# Altium PCB PCB_Internship.PcbDoc
Units mm, origin at the board's own origin, x right, y up, seen from the top; angles counter-clockwise.
Board outline 65 x 145 mm, 4 copper layers (Top Layer, Layer 1, Layer 2, Bottom Layer), stack 1.575 mm thick; 124 components, 62 nets, 264 pads, 86 vias.
Unrouted connection lines stored in the file: 21.
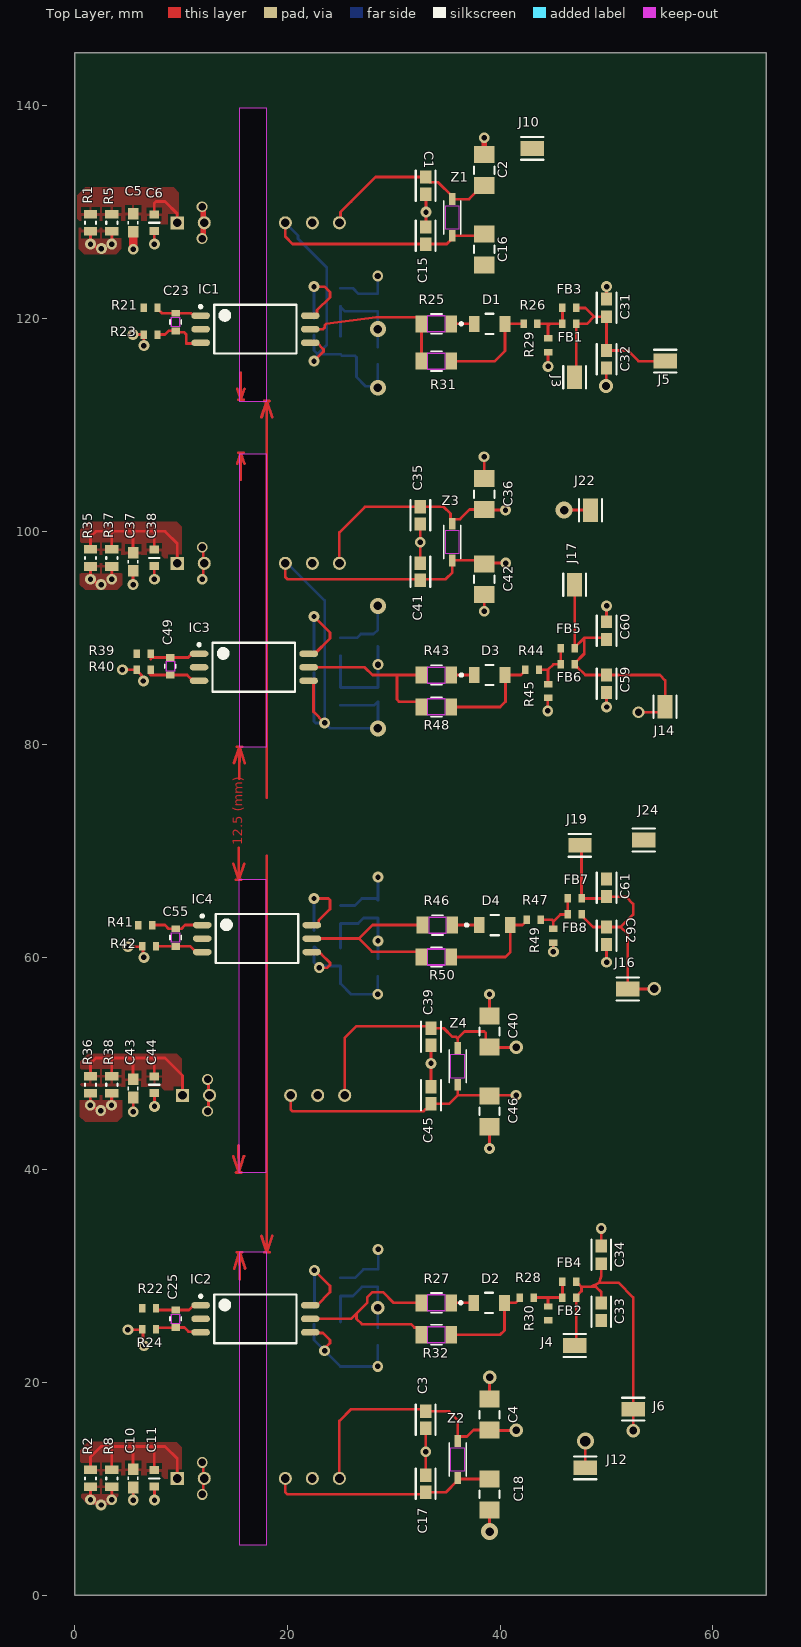
[diagram p0: Top Layer view]
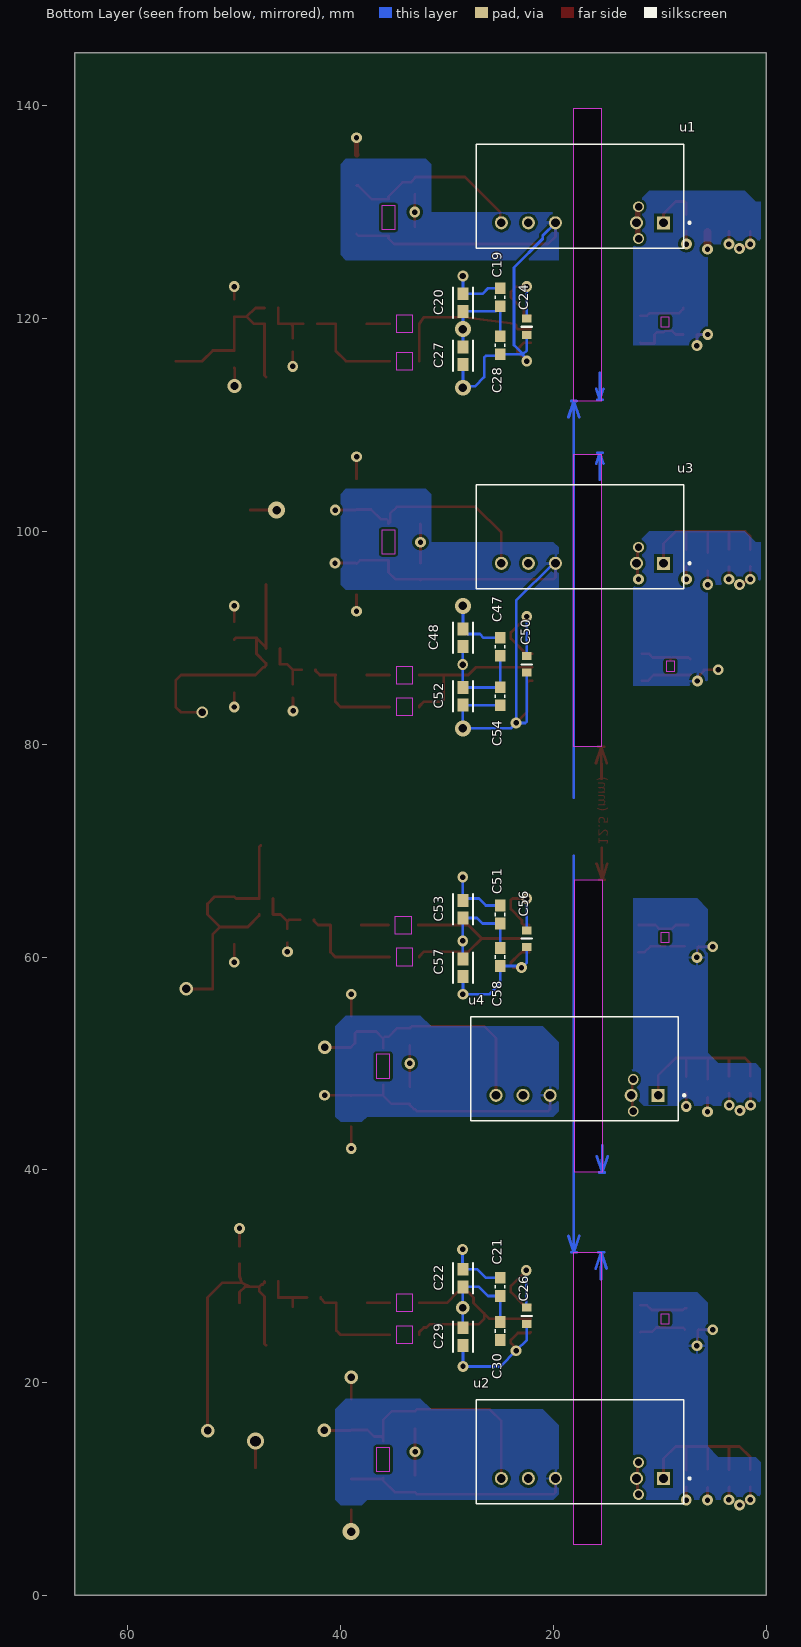
[diagram p1: Bottom Layer view, seen from below]
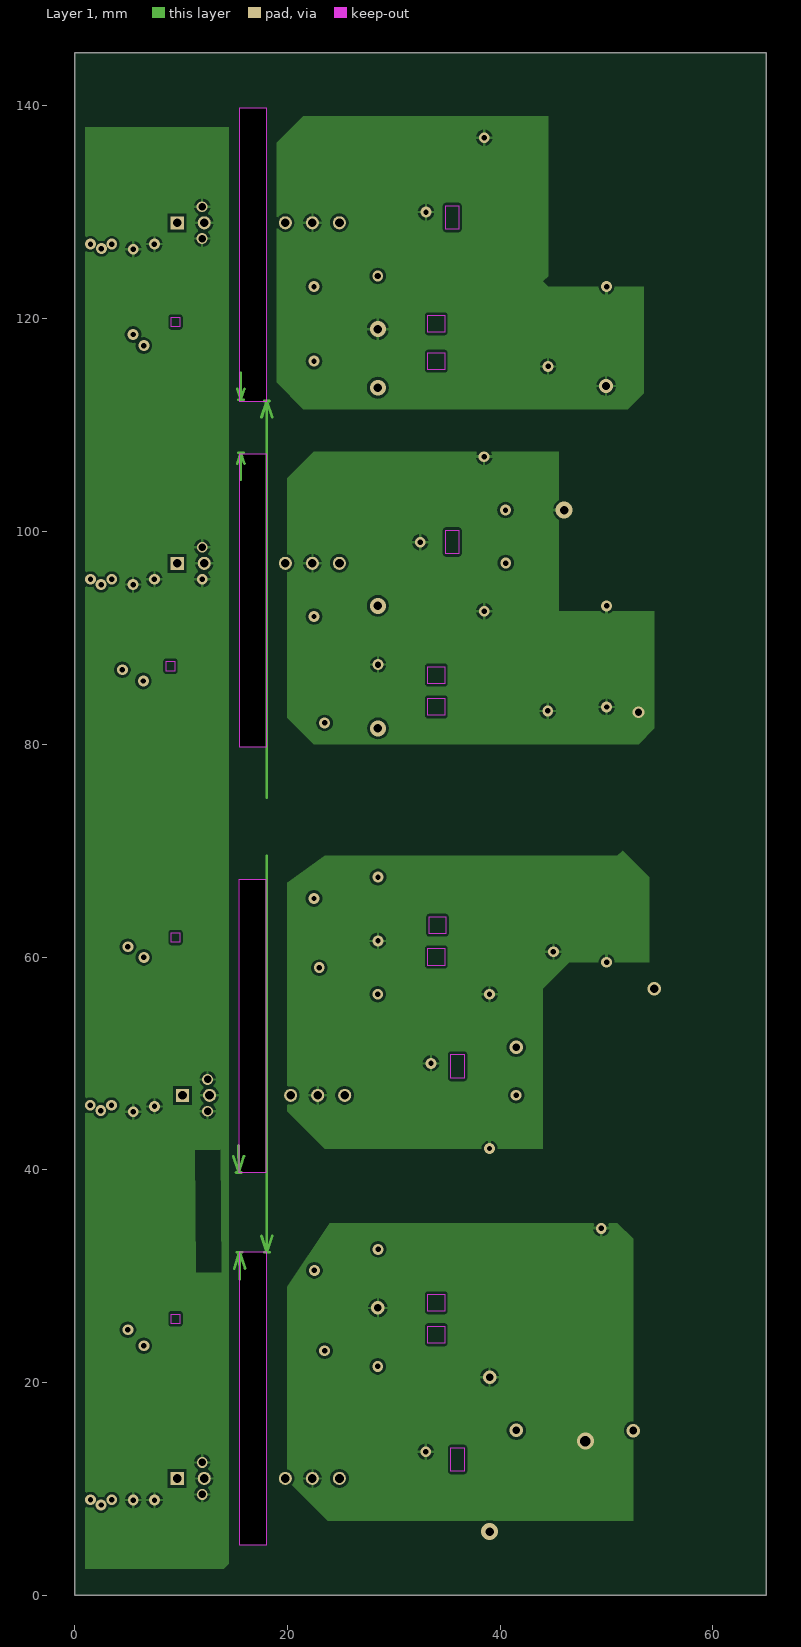
[diagram p2: Layer 1]
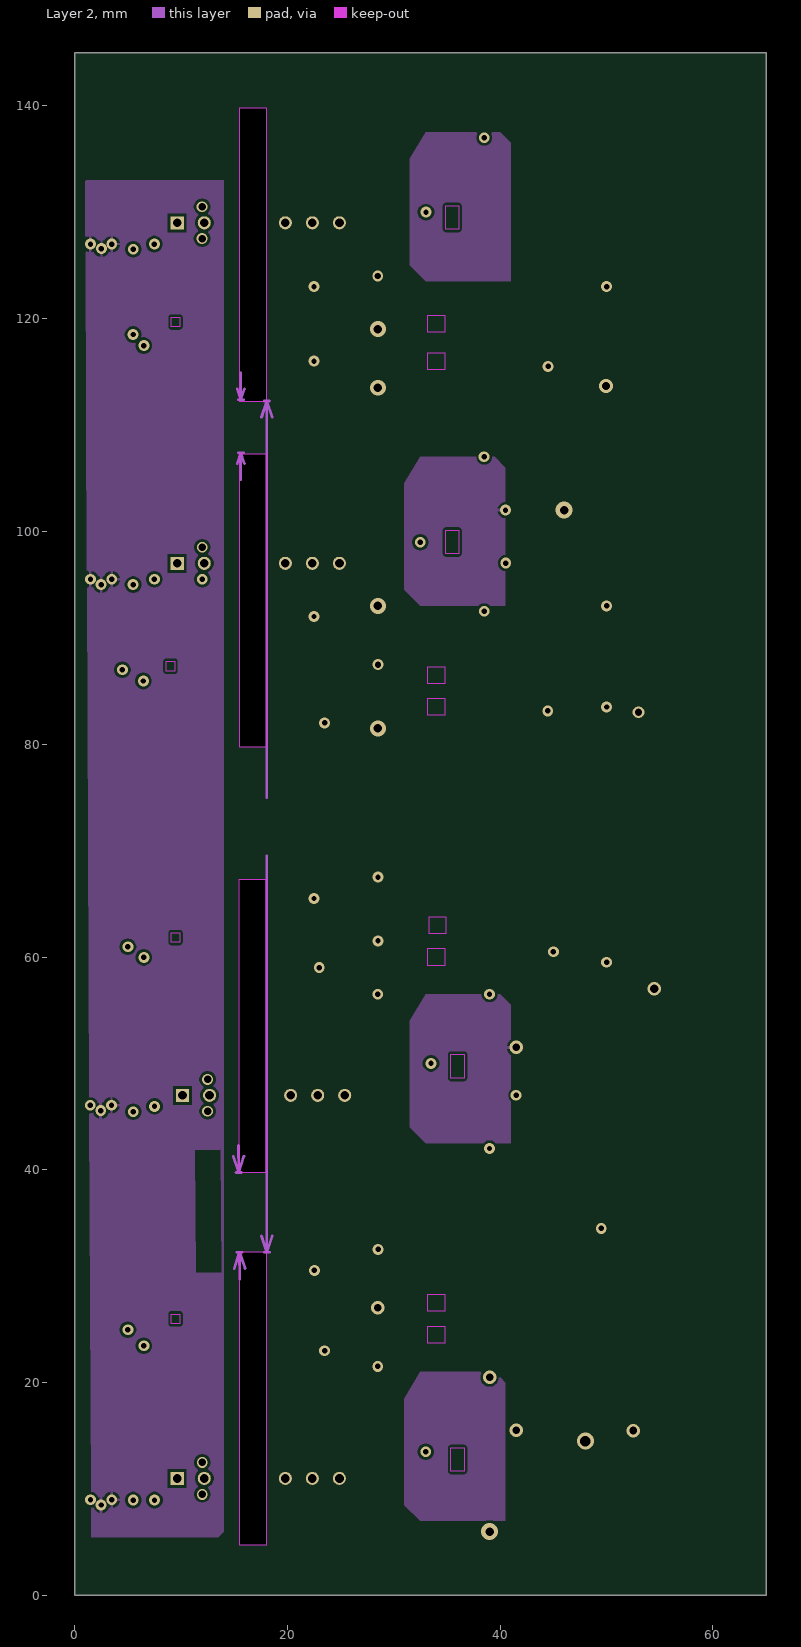
[diagram p3: Layer 2]
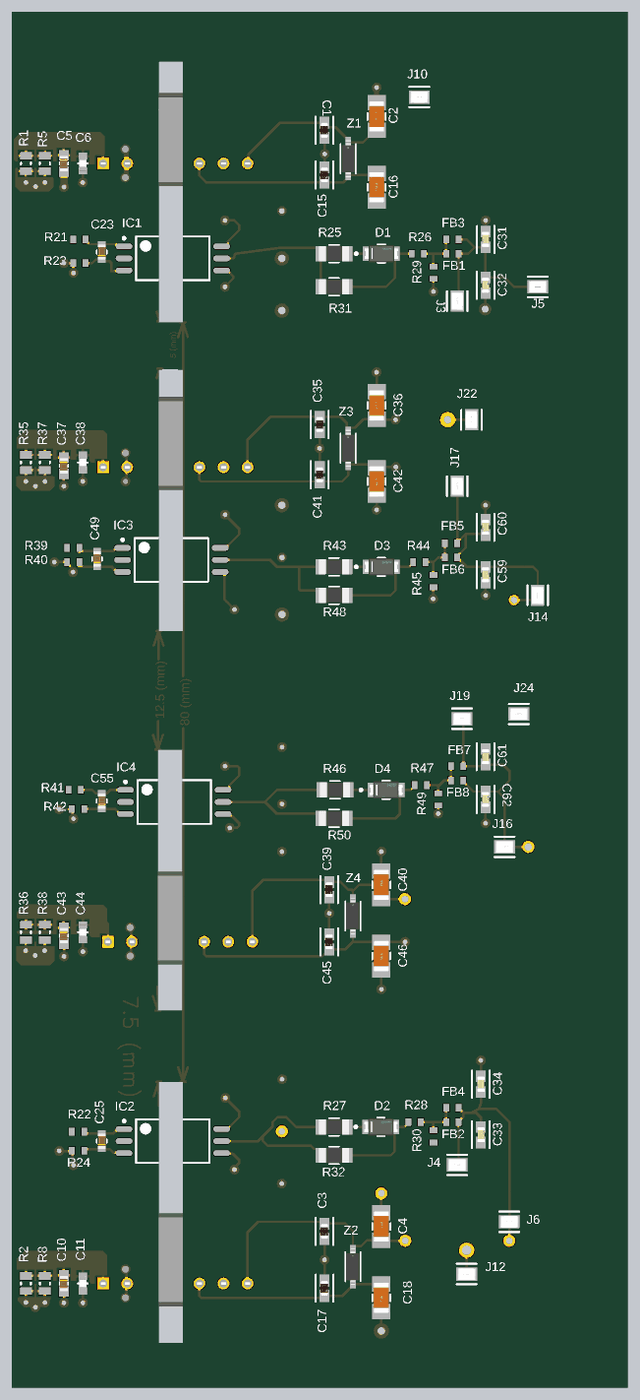
[diagram p4: 3D render of the assembled board from above, using the file's embedded part models]
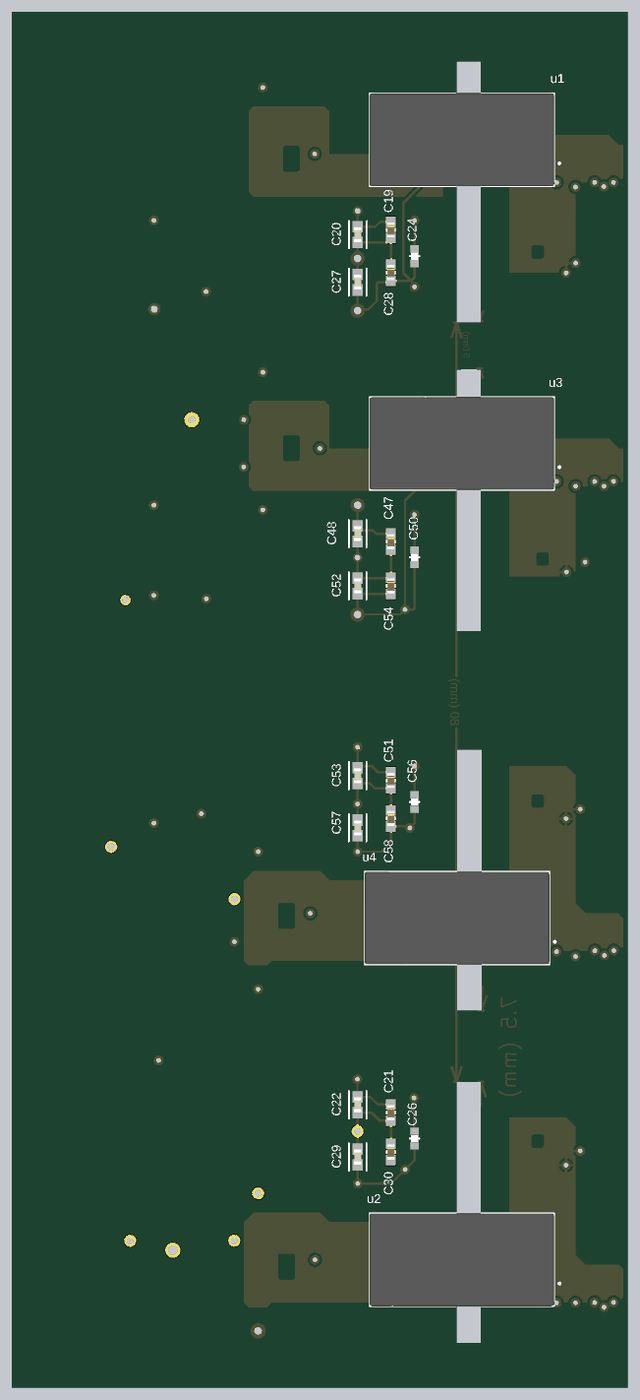
[diagram p5: 3D render of the assembled board from below, using the file's embedded part models]

## Layer stack, top to bottom
Top Solder: solder mask 0.0127, Solder Resist, Dk 3.5
Top Layer: signal copper 0.0356
Dielectric 2: prepreg 0.127, PP-006, Dk 4.1
Layer 1: signal copper 0.0356
Dielectric4: dielectric 1.1786, FR-4, Dk 4.8
Layer 2: signal copper 0.0356
Dielectric 3: prepreg 0.127, PP-006, Dk 4.1
Bottom Layer: signal copper 0.0356
Bottom Solder: solder mask 0.0127, Solder Resist, Dk 3.5

## Board outline
0,145 0,0 65,0 65,145
cut-out: 15.425,67.25 15.425,39.75 18,39.75 18,67.25
cut-out: 15.5,107.25 15.5,79.75 18.075,79.75 18.075,107.25
cut-out: 15.5,32.25 15.5,4.75 18.075,4.75 18.075,32.25
cut-out: 15.5,139.75 15.5,112.25 18.075,112.25 18.075,139.75

## Design rules (kind name [scope] priority, off if disabled: settings)
Clearance [All] p1: gap=0.254 ignorepadtopadclearanceinfootprint=FALSE except(0: Arc-Hole Track-Hole SMDPad-Hole THPad-Hole Via-Hole Fill-Hole Poly-Hole Region-Hole Text-Hole)
PolygonConnect [All] p1: connectstyle=Relief reliefconductorwidth=0.254 reliefentries=4 polygonreliefangle="90 Angle" airgapwidth=0.254
RoutingVias [All] p1: holewidth=0.711 width=1.27 viastyle="Through Hole" minholewidth=0.711 minwidth=1.27 maxholewidth=0.711 maxwidth=1.27
SolderMaskExpansion [All] p1: expansion=0.102 istentingtop=FALSE
Width [All] p1: maxlimit=0.254 minlimit=0.254 preferedwidth=0.254
30 further rules are at their usual default settings.

## Components (designator, comment, footprint, x,y, rotation, side; value= is the part's Value field where it differs from the comment)
C1 "1uF" FP-0603-L_1_6_0_15-W_0_8-IPC_A 33,132.5 r270 top
C2 "10uF" FP-1206-L_3_2_0_2-W_1_6_0-IPC_A 38.5,133.951 r90 top
C3 "1uF" FP-0603-L_1_6_0_15-W_0_8-IPC_A 33,16.5 r270 top
C4 "10uF" FP-1206-L_3_2_0_2-W_1_6_0-IPC_A 39,17 r90 top
C5 "0.1uF" CAPC1608X90 5.5,129 r270 top
C6 "ZRB18AR6YA475KE05L" "FP-ZRB18A-0_2-MFG - duplicate" 7.5,129 r270 top
C10 "0.1uF" CAPC1608X90 5.5,11 r270 top
C11 "ZRB18AR6YA475KE05L" "FP-ZRB18A-0_2-MFG - duplicate" 7.5,11 r270 top
C15 "1uF" FP-0603-L_1_6_0_15-W_0_8-IPC_A 33,127.802 r270 top
C16 "10uF" FP-1206-L_3_2_0_2-W_1_6_0-IPC_A 38.5,126.5 r90 top
C17 "1uF" FP-0603-L_1_6_0_15-W_0_8-IPC_A 33,10.5 r270 top
C18 "10uF" FP-1206-L_3_2_0_2-W_1_6_0-IPC_A 39,9.5 r90 top
C19 "100nF" CAPC1608X90 25,122 r270 bottom
C20 "100nF" FP-C0603C-CF-IPC_A 28.5,121.5 r270 bottom value="10,000 pF"
C21 "100nF" CAPC1608X90 25,29 r270 bottom
C22 "100nF" FP-C0603C-CF-IPC_A 28.5,29.826 r270 bottom value="10,000 pF"
C23 "DNP" CAP_CL10_SAM 9.5,119.672 r90 top
C24 "ZRB18AR6YA475KE05L" "FP-ZRB18A-0_2-MFG - duplicate" 22.5,119.225 r270 bottom
C25 "DNP" CAP_CL10_SAM 9.5,26 r90 top
C26 "ZRB18AR6YA475KE05L" "FP-ZRB18A-0_2-MFG - duplicate" 22.5,26.275 r270 bottom
C27 "100nF" FP-C0603C-CF-IPC_A 28.5,116.5 r270 bottom value="10,000 pF"
C28 "100nF" CAPC1608X90 25,117.5 r270 bottom
C29 "100nF" FP-C0603C-CF-IPC_A 28.5,24.326 r270 bottom value="10,000 pF"
C30 "100nF" CAPC1608X90 25,24.85 r270 bottom
C31 "100nF" FP-C0603C-CF-IPC_A 50,121 r90 top value="10,000 pF"
C32 "100nF" FP-C0603C-CF-IPC_A 50,116.174 r270 top value="10,000 pF"
C33 "100nF" FP-C0603C-CF-IPC_A 49.5,26.674 r270 top value="10,000 pF"
C34 "100nF" FP-C0603C-CF-IPC_A 49.5,32 r90 top value="10,000 pF"
C35 "1uF" FP-0603-L_1_6_0_15-W_0_8-IPC_A 32.5,101.5 r270 top
C36 "10uF" FP-1206-L_3_2_0_2-W_1_6_0-IPC_A 38.5,103.5 r90 top
C37 "0.1uF" CAPC1608X90 5.5,97.15 r270 top
C38 "ZRB18AR6YA475KE05L" "FP-ZRB18A-0_2-MFG - duplicate" 7.5,97.5 r270 top
C39 "1uF" FP-0603-L_1_6_0_15-W_0_8-IPC_A 33.5,52.5 r270 top
C40 "10uF" FP-1206-L_3_2_0_2-W_1_6_0-IPC_A 39,53 r90 top
C41 "1uF" FP-0603-L_1_6_0_15-W_0_8-IPC_A 32.5,96.198 r270 top
C42 "10uF" FP-1206-L_3_2_0_2-W_1_6_0-IPC_A 38.5,95.5 r90 top
C43 "0.1uF" CAPC1608X90 5.5,47.65 r270 top
C44 "ZRB18AR6YA475KE05L" "FP-ZRB18A-0_2-MFG - duplicate" 7.5,48 r270 top
C45 "1uF" FP-0603-L_1_6_0_15-W_0_8-IPC_A 33.5,47 r270 top
C46 "10uF" FP-1206-L_3_2_0_2-W_1_6_0-IPC_A 39,45.5 r90 top
C47 "100nF" CAPC1608X90 25,89.15 r270 bottom
C48 "100nF" FP-C0603C-CF-IPC_A 28.5,90 r270 bottom value="10,000 pF"
C49 "DNP" CAP_CL10_SAM 9,87.328 r90 top
C50 "ZRB18AR6YA475KE05L" "FP-ZRB18A-0_2-MFG - duplicate" 22.5,87.5 r270 bottom
C51 "100nF" CAPC1608X90 25,64 r270 bottom
C52 "100nF" FP-C0603C-CF-IPC_A 28.5,84.5 r270 bottom value="10,000 pF"
C53 "100nF" FP-C0603C-CF-IPC_A 28.5,64.5 r270 bottom value="10,000 pF"
C54 "100nF" CAPC1608X90 25,84.5 r270 bottom
C55 "DNP" CAP_CL10_SAM 9.5,61.828 r90 top
C56 "ZRB18AR6YA475KE05L" "FP-ZRB18A-0_2-MFG - duplicate" 22.5,61.725 r270 bottom
C57 "100nF" FP-C0603C-CF-IPC_A 28.5,59 r270 bottom value="10,000 pF"
C58 "100nF" CAPC1608X90 25,60 r270 bottom
C59 "100nF" FP-C0603C-CF-IPC_A 50,85.674 r270 top value="10,000 pF"
C60 "100nF" FP-C0603C-CF-IPC_A 50,90.674 r90 top value="10,000 pF"
C61 "100nF" FP-C0603C-CF-IPC_A 50,66.5 r90 top value="10,000 pF"
C62 "100nF" FP-C0603C-CF-IPC_A 50,62 r270 top value="10,000 pF"
D1 "1N5819HW1-7-F" FP-SOD123F_Type_B-MFG 39,119.5 r0 top value=30pF
D2 "1N5819HW1-7-F" FP-SOD123F_Type_B-MFG 38.95,27.5 r0 top value=30pF
D3 "1N5819HW1-7-F" FP-SOD123F_Type_B-MFG 39,86.5 r0 top value=30pF
D4 "1N5819HW1-7-F" FP-SOD123F_Type_B-MFG 39.5,63 r0 top value=30pF
FB1 "BEAD" RESC1608X55X25LL10T15 46.5,119.5 r0 top
FB2 "BEAD(DNP)" RESC1608X55X25LL10T15 46.5,28 r0 top
FB3 "BEAD" RESC1608X55X25LL10T15 46.5,121 r0 top
FB4 "BEAD" RESC1608X55X25LL10T15 46.5,29.5 r0 top
FB5 "BEAD" RESC1608X55X25LL10T15 46.35,89 r0 top
FB6 "BEAD" RESC1608X55X25LL10T15 46.35,87.5 r0 top
FB7 "BEAD(DNP)" RESC1608X55X25LL10T15 47,65.5 r0 top
FB8 "BEAD" RESC1608X55X25LL10T15 47,64 r0 top
IC1 "Si8261BCD-C-IS" SLAB-SDIP6_L 17,119 r0 top
IC2 "Si8261BCD-C-IS" SLAB-SDIP6_L 17,26 r0 top
IC3 "Si8261BCD-C-IS" SLAB-SDIP6_L 16.85,87.23 r0 top
IC4 "Si8261BCD-C-IS" SLAB-SDIP6_L 17.15,61.73 r0 top
J3 "G_AU" FP-S2751-46R-MFG 47,114.5 r90 top
J4 "G_BU" FP-S2751-46R-MFG 47,23.5 r0 top
J5 "G_AU" FP-S2751-46R-MFG 55.5,116 r0 top
J6 "G_BL" FP-S2751-46R-MFG 52.5,17.5 r0 top
J10 "K_L" FP-S2751-46R-MFG 43,136 r0 top
J12 "K_L" FP-S2751-46R-MFG 48,12 r180 top
J14 "G_AL" FP-S2751-46R-MFG 55.5,83.5 r90 top
J16 "G_BL" FP-S2751-46R-MFG 52,57 r0 top
J17 "G_AL" FP-S2751-46R-MFG 47,95 r90 top
J19 "G_BL" FP-S2751-46R-MFG 47.5,70.5 r0 top
J22 "K_L" FP-S2751-46R-MFG 48.5,102 r90 top
J24 "K_L" FP-S2751-46R-MFG 53.5,71 r0 top
R1 "5.1" RESC2013X60X35LL10T20 1.5,129 r90 top
R2 "5.1" RESC2013X60X35LL10T20 1.5,11 r90 top
R5 "5.1" RESC2013X60X35LL10T20 3.5,129 r90 top
R8 "5.1" RESC2013X60X35LL10T20 3.5,11 r90 top
R21 "91.0" RESC1608X55X25LL10T15 7.15,121 r0 top
R22 "91.0" RESC1608X55X25LL10T15 7,27 r0 top
R23 "91" RESC1608X55X25LL10T15 7.15,118.5 r0 top
R24 "91" RESC1608X55X25LL10T15 7,25 r0 top
R25 "DNP" RC1206N_YAG 34,119.5 r0 top
R26 "0" RESC1608X55X25LL10T15 42.85,119.5 r0 top
R27 "DNP" RC1206N_YAG 34,27.5 r0 top
R28 "0" RESC1608X55X25LL10T15 42.5,28 r0 top
R29 "5.2K" RESC1608X55X25LL10T15 44.5,117.5 r90 top
R30 "5.2K" RESC1608X55X25LL10T15 44.5,26.5 r90 top
R31 "8.2" RC1206N_YAG 34,116 r0 top
R32 "8.2" RC1206N_YAG 34,24.5 r0 top
R35 "5.1" RESC2013X60X35LL10T20 1.5,97.5 r90 top
R36 "5.1" RESC2013X60X35LL10T20 1.5,48 r90 top
R37 "5.1" RESC2013X60X35LL10T20 3.5,97.5 r90 top
R38 "5.1" RESC2013X60X35LL10T20 3.5,48 r90 top
R39 "91.0" RESC1608X55X25LL10T15 6.5,88.5 r0 top
R40 "91" RESC1608X55X25LL10T15 6.5,87 r0 top
R41 "91.0" RESC1608X55X25LL10T15 6.65,63 r0 top
R42 "91" RESC1608X55X25LL10T15 7,61 r0 top
R43 "DNP" RC1206N_YAG 34,86.5 r0 top
R44 "0" RESC1608X55X25LL10T15 43,87 r0 top
R45 "5.2K" RESC1608X55X25LL10T15 44.5,85 r90 top
R46 "DNP" RC1206N_YAG 34.103,63 r0 top
R47 "0" RESC1608X55X25LL10T15 43.15,63.5 r0 top
R48 "8.2" RC1206N_YAG 34,83.5 r0 top
R49 "5.2K" RESC1608X55X25LL10T15 45,62 r90 top
R50 "8.2" RC1206N_YAG 34,60 r0 top
u1 "dc to dc" CONV_R15P21503D 17.5,131.5 r0 bottom
u2 "dc to dc" CONV_R15P21503D 17.5,13.5 r0 bottom
u3 "dc to dc" CONV_R15P21503D 17.5,99.5 r0 bottom
u4 "dc to dc" CONV_R15P21503D 18,49.5 r0 bottom
Z1 "22V" SOD123_DIO 35.5,129.5 r270 top
Z2 "22V" SOD123_DIO 36,12.775 r270 top
Z3 "22V" SOD123_DIO 35.5,99 r270 top (schematic designator Z73)
Z4 "22V" SOD123_DIO 36,49.725 r270 top

## Footprints (in the part's own frame and the unit in brackets; to place one, negate y for a bottom-side part, rotate by r counter-clockwise, add the part's x,y. Pads: shape width x height; smd on the part's side, far side on the other; paste and mask are expansions set on the pad)
CAP_CL10_SAM [mm]
  rect 0.656x0.8 smd paste+0 mask+0: 1(-0.828,0) 2(0.828,0)
  Top Layer keep-out region: -0.449,-0.349 -0.449,0.349 0.449,0.349 0.449,-0.349
  Keep-Out Layer region: -0.449,-0.4 -0.449,0.4 0.449,0.4 0.449,-0.4
  silkscreen extent -0.19,-0.53 0.19,0.53, body extent -0.8,-0.4 0.8,0.4, height 0.9
CAPC1608X90 [mm]
  rect 1.1x1 smd: 1(-0.85,0) 2(0.85,0)
  silkscreen extent -0.15,-0.45 0.15,0.45, body extent -0.8,-0.4 0.8,0.4, height 0.9
CONV_R15P21503D [mm]
  rect 1.23x1.23 hole 0.82: 1(-7.85,2.5)
  round 1.23 hole 0.82: 2(-5.31,2.5) 5(2.31,2.5) 6(4.85,2.5) 7(7.39,2.5)
  silkscreen extent -10.4,-4.9 9.75,4.9, body extent -9.75,-4.9 9.75,4.9, height 12.01
FP-0603-L_1_6_0_15-W_0_8-IPC_A [mm]
  rect 1.258x1.062 smd paste+0 mask+0: 1(-0.802,0) 2(0.802,0)
  silkscreen extent -1.43,-0.93 1.43,0.93, body extent -1.93,-1.03 1.93,1.03, height 0.25
FP-1206-L_3_2_0_2-W_1_6_0-IPC_A [mm]
  rect 1.604x1.906 smd paste+0 mask+0: 1(-1.451,0) 2(1.451,0)
  silkscreen extent -0.35,-0.95 0.35,0.95, body extent -2.75,-1.45 2.75,1.45, height 0.25
FP-C0603C-CF-IPC_A [mil]
  rect 47.5x41.66 smd paste+0 mask+0: 1(-32.51,0) 2(32.51,0)
  silkscreen extent -56,-37 56,37, body extent -31,-16 31,16, height 34
FP-S2751-46R-MFG [mm]
  rect 2.2x1.4 smd paste+0 mask+0: 1(0,0)
  silkscreen extent -1.05,-1.08 1.05,1.07, body extent -1.2,-0.8 1.2,0.8, height 0.25
FP-SOD123F_Type_B-MFG [mm]
  rect 1x1.5 smd paste+0 mask+0: 1(-1.45,0) 2(1.45,0)
  silkscreen extent -2.77,-0.95 0.38,0.95, body extent -2.05,-1.05 2.05,1.05, height 0.25
"FP-ZRB18A-0_2-MFG - duplicate" [mm]
  rect 0.75x0.9 smd paste+0 mask+0: 1(-0.775,0) 2(0.775,0)
  silkscreen extent 0,-0.5 0,0.5, body extent -1.25,-0.6 1.25,0.6, height 0.25
RC1206N_YAG [mil]
  rect 44x63 smd paste+0 mask+0: 1(-55,0) 2(55,0)
  Top Layer keep-out region: -31,-29.5 -31,29.5 31,29.5 31,-29.5
  Keep-Out Layer region: -31,-31.5 -31,31.5 31,31.5 31,-31.5
  silkscreen extent -21,-36 21,37, body extent -63,-31 63,31, height 28
RESC1608X55X25LL10T15 [mm] "Chip Resistor, 2-Leads, Body 1.70x0.90mm, IPC High Density"
  rect 0.6x0.8 smd: 1(-0.65,0) 2(0.65,0)
  body extent -0.85,-0.45 0.85,0.45, height 0.55
RESC2013X60X35LL10T20 [mm] "Chip Resistor, 2-Leads, Body 2.00x1.25mm, IPC High Density"
  rect 0.8x1.25 smd: 1(-0.8,0) 2(0.8,0)
  silkscreen extent -0.1,-0.52 0.1,0.52, body extent -1.05,-0.67 1.05,0.67, height 0.6
SLAB-SDIP6_L [mm] "SOP, 6-Leads, Body 7.5x4.58mm, Pitch 1.27mm, IPC High Density"
  oval 1.75x0.6 smd: 1(-5.15,1.27) 2(-5.15,0) 3(-5.15,-1.27) 4(5.15,-1.27) 5(5.15,0) 6(5.15,1.27)
  silkscreen extent -5.27,-2.3 3.87,2.3, body extent -3.75,-2.3 3.75,2.3, height 2.65
SOD123_DIO [mm]
  rect 1.111x0.601 smd paste+0 mask+0: 1(-1.725,0) 2(1.725,0)
  Keep-Out Layer region: -1.119,-0.624 -1.119,0.624 1.119,0.624 1.119,-0.624
  silkscreen extent -1.55,-0.8 1.55,0.8, body extent -1.92,-0.67 1.92,0.67, height 0.81

## Part data
C1 C3 C15 C17 C35 C39 C41 C45: library part CMP-2000-07531-4, "Ceramic Capacitor General Use 1uF ±10% 50V X7R 0603", Case Code (Imperial)=0603, Case Code (Metric)=1608, Dielectric=X7R, Max Operating Temperature=125°C, Min Operating Temperature=-55°C, Package Quantity=1, Tolerance=10%, Voltage Rating=50V, Capacitance=1uF, Case/Package=0603, Construction=Flat, Depth=0.8mm, Halogen Free="Halogen Free", Height=0.8mm, Length=1.6mm, Mount="Surface Mount", Packaging="Tape and Reel", Radiation Hardening=No, RoHS Compliant=Yes, Series=M, Termination=SMD/SMT, Thickness=0.037inch, Voltage Rating (DC)=50V, Width=0.031inch
C2 C4 C16 C18 C36 C40 C42 C46: library part CMP-2000-06324-3, "10 µF ±10% 35V Ceramic Capacitor X7R 1206 (3216 Metric)", Case Code (Imperial)=1206, Case Code (Metric)=3216, Dielectric=X7R, Max Operating Temperature=125°C, Min Operating Temperature=-55°C, Package Quantity=2000, Resistor Type=Ceramic, Tolerance=10%, Voltage Rating=35V, Capacitance=10uF, Case/Package=1206, Height=1.6mm, Length=0.126inch, Mount="Surface Mount", Packaging="Tape and Reel", REACH SVHC="No SVHC", RoHS Compliant=Yes, Series=M, Termination=SMD/SMT, Thickness=0.071inch, Voltage Rating (DC)=35V, Width=1.6mm
C5 C10 C19 C21 C28 C30 C37 C43 C47 C51 C54 C58: library part MM035C104KCZ2A_1, "0.1 µF ±10% 50V Ceramic Capacitor X7R 0603 (1608 Metric)"
C6 C11 C24 C26 C38 C44 C50 C56: library part CMP-06035-062684-1, "CAP CER 4.7UF 35V X5R 0603", Capacitance=4.7uF, Case Code (Imperial)=0603, Case Code (Metric)=1608, Dielectric=X5R, Max Operating Temperature=85°C, Min Operating Temperature=-55°C, Tolerance=10%, Voltage Rating=35V, Case/Package=0603, Length=0.063inch, Mount="Surface Mount", Packaging="Cut Tape", REACH SVHC="No SVHC", RoHS Compliant=Yes, Thickness=0.047inch, Voltage Rating (DC)=35V, Width=0.031inch
C20 C22 C27 C29 C31 C32 C33 C34 C48 C52 C53 C57 C59 C60 C61 C62: library part CMP-2006-03046-3, "CAP CER 10000PF 50V X7R 0603", Capacitance="10,000 pF", Manufacturer=KEMET, Manufacturer Part Number=C0603C103K5RACTU, Package=C0603C-CF, Temperature="-55°C to +125°C", Temperature Characteristic=X7R, Temperature Coefficient=30ppm/°C, Temperature Range High=+125°C, Temperature Range Low=-55°C, Tolerance=0.1, Voltage Rating="50 V", Automotive=Yes, Automotive Grade="Grade 1", Category=Cap, ComponentLink2Description=Datasheet, ComponentLink2URL=https://api.kemet.com/component-edge/download/datasheet/C0603C100J5GACAUTO.pdf, Device Class L1="Passive Components", Device Class L2=Capacitors, Device Class L3="Ceramic Capacitors", Digikey Description="CAP CER 10000PF 50V X7R 0603", Height=0.87mm, Lead Free=Yes, Material=Ceramic, Mouser Description="Ceramic Capacitor 0.01Uf, 50V, X7R, 10%, 0603, Full Reel", Octopart=https://octopart.com/c0603c103k5ractu-kemet-133094, RoHS=TRUE
C23 C25 C49 C55: library part CL10B104KB8NNWC, "0.1 µF ±10% 50V Ceramic Capacitor X7R 0603 (1608 Metric)", Mfr_Name=Samsung, Digi-Key_Part_Number_1=1276-1935-2-ND, Digi-Key_Part_Number_2=1276-1935-1-ND, Digi-Key_Part_Number_3=1276-1935-6-ND
D1 D2 D3 D4: library part CMP-12791-000028-1, "DIODE SBR 40V 1A SOD123F", Capacitance=30pF, Forward Current=1A, Manufacturer="Diodes Inc.", Max Junction Temp=+125°C, Max Repetitive Reverse Voltage=40V, Max Surge Forward Current=30A, Package="SOD123F (Type B)", Peak Reverse Current=0.5mA, Temperature="-55°C to +125°C", Temperature Range Low=-55°C, Automotive=No, Category=Diode, ComponentLink2Description=Datasheet, ComponentLink2URL=https://www.diodes.com/assets/Datasheets/1N5819HW1.pdf, Device Class L1="Discrete Semiconductors", Device Class L2=Diodes, Device Class L3="Rectifier Diodes", Digikey Description="DIODE SBR 40V 1A SOD123F", Footprint Url=https://www.diodes.com/assets/Package-Files/SOD123F%20(Type%20B).pdf, Height=1.15mm, Ipc Land Pattern Name=SOD350180X98-2, Lead Free=Yes, Manufacturer Part Number=1N5819HW1-7-F, Mouser Description="Schottky Diodes & Rectifiers 1A SBR 40Vrrm 0.51Vf 0.5mA 28Vrms", Octopart=https://octopart.com/1n5819hw1-7-f-diodes+inc.-67250096, Reverse Voltage=40V, RoHS=TRUE, Temperature Range High=+125°C
FB1 FB2 FB3 FB4 FB5 FB6 FB7 FB8: library part CMP-2100-03667-1_1, "Chip Resistor, 0 Ohm, +/- 5%, 0.1 W, -55 to 155 degC, 0603 (1608 Metric), RoHS, Tape and Reel", Case Code (Imperial)=0603, Case Code (Metric)=1608, Manufacturer=Yageo, Max Operating Temperature=155degC, Min Operating Temperature=-55degC, Package Description="2-Pin Surface Mount Device, Body 1.6 x 0.8 mm", Package Quantity=5000, Power Rating=100mW, Resistance=0mOhm, Temperature Coefficient=200ppm/degreesC, Tolerance=5%, Voltage Rating=50V, Case/Package=0603, Composition=ThickFilm, Contact Plating=Tin, Datasheet URL=http://www.yageo.com/NewPortal/yageodocoutput?fileName=/pdf/R-Chip/PYu-RC_Group_51_RoHS_L_5.pdf, Datasheet Version="Rev. 5, 10/2016", Depth=0.8mm, Height=0.45mm, Lead Free=LeadFree, Length=1.6mm, Manufacturer URL=http://www.yageo.com/, Military Standard=Not, Number of Pins=2, Package Reference=0603, Packaging=TapeandReel, Radiation Hardening=No, REACH SVHC=NoSVHC, RoHSCompliant=true, Termination=SMD/SMT, Voltage Rating (DC)=50V, Width=0.8mm
IC1 IC2 IC3 IC4: library part CMP-0512-00085-1, "Led Emulator Input, 4.0 A Isolated Gate Drivers, 5 to 30 V Driver Supply, 5 kVRMS Isolation Rating, -40 to 125 degC, 6-pin SOP", Isolation Rating (Input-Output, kVrms)=5, Manufacturer="Silicon Labs", UVLO Voltage="12 V", 10kV surge=TRUE, ComponentLink1Description="Manufacturer URL", ComponentLink1URL=http://www.silabs.com/, ComponentLink2Description=Datasheet, ComponentLink2URL=http://www.silabs.com/Support%20Documents/TechnicalDocs/Si826x.pdf, ComponentLink3Description="Package Specification", ComponentLink3URL=http://www.silabs.com/Support%20Documents/TechnicalDocs/Si826x.pdf, DatasheetVersion="Rev. 0.9", Driver Supply="5 to 30 V", Max. Prop. Delay (ns)=60, Mounting Technology="Surface Mount", Overlap Protection & Dead Time Control=FALSE, PackageDescription="6-Pin SDIP, Body 4.58 x 7.5 mm, Pitch 1.27 mm", PackageReference=SDIP6, PartNumber=Si8261BCD-C-IS, Sub-Family=ISOdrivers
J3 J4 J5 J6 J10 J12 J14 J16 J17 J19 J22 J24: library part CMP-15817-000010-1, "PC TEST POINT NATURAL", Color=Natural, Body Material=Brass, Material="Copper Alloy", Mount="Surface Mount", Packaging="Cut Tape", Plating=Tin
R1 R2 R5 R8 R35 R36 R37 R38: library part RC0805JR-075R1L, "Thick Film Resistors - SMD 5.1 Ohms 125 mW 0805 5%", Manufacturer=Yageo, Part Number=RC0805JR-075R1L
R21 R22 R23 R24 R39 R40 R41 R42: library part CMP-2000-04159-1, "91 Ohms ±1% 0.1W, 1/10W Chip Resistor 0603 (1608 Metric) Moisture Resistant Thick Film", Manufacturer=Yageo, Part Number=RC0603FR-0791RL
R25 R27 R31 R32 R43 R46 R48 R50: library part RC1206FR-078R2L, "8.2 Ohms ±1% 0.25W, 1/4W Chip Resistor 1206 (3216 Metric) Moisture Resistant Thick Film", Mfr_Name=Yageo, Digi-Key_Part_Number_1=311-8.20FRCT-ND, Digi-Key_Part_Number_2=311-8.20FRDKR-ND, Digi-Key_Part_Number_3=311-8.20FRTR-ND
R26 R28 R44 R47: library part CMP-2100-03667-1, "Chip Resistor, 0 Ohm, +/- 5%, 0.1 W, -55 to 155 degC, 0603 (1608 Metric), RoHS, Tape and Reel", Case Code (Imperial)=0603, Case Code (Metric)=1608, Manufacturer=Yageo, Max Operating Temperature=155degC, Min Operating Temperature=-55degC, Package Description="2-Pin Surface Mount Device, Body 1.6 x 0.8 mm", Package Quantity=5000, Power Rating=100mW, Resistance=0mOhm, Temperature Coefficient=200ppm/degreesC, Tolerance=5%, Voltage Rating=50V, Case/Package=0603, Composition=ThickFilm, Contact Plating=Tin, Datasheet URL=http://www.yageo.com/NewPortal/yageodocoutput?fileName=/pdf/R-Chip/PYu-RC_Group_51_RoHS_L_5.pdf, Datasheet Version="Rev. 5, 10/2016", Depth=0.8mm, Height=0.45mm, Lead Free=LeadFree, Length=1.6mm, Manufacturer URL=http://www.yageo.com/, Military Standard=Not, Number of Pins=2, Package Reference=0603, Packaging=TapeandReel, Radiation Hardening=No, REACH SVHC=NoSVHC, RoHSCompliant=true, Termination=SMD/SMT, Voltage Rating (DC)=50V, Width=0.8mm
R29 R30 R45 R49: library part CMP-1012-00091-2, "Chip Resistor, 5.1 KOhm, +/- 5%, 0.1 W, -55 to 155 degC, 0603 (1608 Metric), RoHS, Tape and Reel", Case Code - in=0603, Case Code - mm=1608, Manufacturer=Yageo, Operating Temperature Range=-55Cto+155C, Package Description="2-Pin Surface Mount Device, Body 1.6 x 0.8 mm", Power Rating=100mW, Resistance=5.1kOhms, Temperature Coefficient=100PPM/C, Tolerance=5%, Voltage Rating=50V, Datasheet URL=http://www.yageo.com/documents/recent/PYu-RC_Group_51_RoHS_L_7.pdf, Datasheet Version="Rev. 7, 05/2017", Manufacturer URL=http://www.yageo.com/, Mounting Technology=SurfaceMount, Package Reference=0603, Packaging=Reel, Product=ThickFilmResistorsGeneralPurpose, Series=RC, Termination Style=SMD/SMT
u1 u2 u3 u4: library part R15P21503D, "2W DC/DC-Converter 'ECONOLINE' SIP7 6.4kV unreg", Package="SIP-7 Recom Power", Check_prices=https://www.snapeda.com/parts/R15P21503D/Recom%20Power/view-part/3601956/?ref=eda, Digi-Key_Part_Number=945-3070-5-ND, MF="Recom Power", MP=R15P21503D, SnapEDA_Link=https://www.snapeda.com/parts/R15P21503D/Recom%20Power/view-part/3601956/?ref=snap
Z1 Z2 Z3 Z4: library part MMSZ5251B-7-F, "Zener Diode 22 V 500 mW ±5% Surface Mount SOD-123", Mfr_Name="Diodes Inc", Digi-Key_Part_Number_1=MMSZ5251B-FDICT-ND, Digi-Key_Part_Number_2=MMSZ5251B-FDIDKR-ND, Digi-Key_Part_Number_3=MMSZ5251B-FDITR-ND

## Via types
v1: diameter 1.016, hole 0.508, Top Layer to Bottom Layer, tented both sides, 62 vias
v2: diameter 1.016, hole 0.7, Top Layer to Bottom Layer, tented both sides, 7 vias
v3: diameter 1.27, hole 0.711, Top Layer to Bottom Layer, 5 vias
v4: diameter 1.5, hole 0.8, Top Layer to Bottom Layer, tented both sides, 4 vias
v5: diameter 1, hole 0.6, Top Layer to Bottom Layer, tented both sides, 2 vias
v6: diameter 1.6, hole 1, Top Layer to Bottom Layer, 1 vias
v7: diameter 1.1, hole 0.7, Top Layer to Bottom Layer, 1 vias
v8: diameter 1.6, hole 0.8, Top Layer to Bottom Layer, tented both sides, 1 vias
v9: diameter 1.27, hole 0.8, Top Layer to Bottom Layer, 1 vias
v10: diameter 1.6, hole 0.8, Top Layer to Bottom Layer, 1 vias
v11: diameter 1.3, hole 0.75, Top Layer to Bottom Layer, tented both sides, 1 vias

## Nets (pads, with @x,y where several pads share a name; then routed paths per layer and width w, separated by ;. In a path a pad name is that pad's centre, name@x,y a point inside that pad or via, vN(x,y) a via of type N, cw(c..) or ccw(c..) an arc to the next point about the centre after c; other vN are vias at no path point)
"+15 VIN": R1.1 R2.1 R5.1 R8.1 R35.1 R36.1 R37.1 R38.1 | length 14.4
  Top Layer w0.254: R35.1@1.468,96.668 R35.1 v1(1.5,95.5) 1.706,95.5 2.06,95.146 2.354,95.146 v1(2.5,95) ; R2.1 v1(1.5,9) 1.706,9 2.06,8.646 2.354,8.646 v1(2.5,8.5) ; R1.1 v1(1.5,127) 1.706,127 1.988,126.719 2.378,126.719 v1(2.523,126.573) ; R36.1@1.514,47.186 R36.1 1.468,47.168 v1(1.468,46.067) 1.674,46.067 2.029,45.713 2.322,45.713 v1(2.468,45.567) ; v1(3.468,46.067) 3.468,47.168 R38.1 R38.1@3.514,47.186 ; R8.1@3.484,10.184 R8.1 v1(3.5,9) ; v1(3.5,95.5) R37.1 ; v1(3.5,127) R5.1
+15VA1: C1.1 C2.1 C19.1 C20.1 C24.1 IC1.6 u1.7 Z1.1 | length 30.9
  Top Layer w0.254: IC1.6 22.631,120.27 22.791,120.43 22.791,120.791 24,122 24,122.5 23.5,123 v1(22.5,123) ; u1.7 25,129.11 25,130 26,131 28.302,133.302 C1.1 33,133.204 33.404,132.8 34.18,132.8 35.5,131.48 Z1.1 37.074,131.225 38.349,132.5 C2.1
  Bottom Layer w0.254: C24.1 v1(22.5,123) ; C19.1 26.15,122.85 26.674,122.326 C20.1 v5(28.5,124)
+15VA2: C35.1 C36.1 C47.1 C48.1 C50.1 IC3.6 u3.7 Z3.1 | length 36.4
  Top Layer w0.254: IC3.6 22.575,88.5 24,89.925 24,90.5 v1(22.5,92) ; u3.7 24.89,99.89 27.302,102.302 C35.1 34.698,102.302 35.338,101.662 35.338,100.887 Z3.1 35.5,100.98 35.673,101.154 36.226,101.154 37.121,102.049 C36.1 38.549,102 v1(40.5,102)
  Bottom Layer w0.254: C50.1 v1(22.5,92) ; C47.1 26.561,90 26.91,90.35 28.098,90.35 28.5,90.752 C48.1 v4(28.5,93)
+15VB1: C3.1 C4.1 C21.1 C22.1 C26.1 IC2.6 u2.7 Z2.1 | length 39.5
  Top Layer w0.254: IC2.6 22.77,27.27 24,28.5 24,29.092 v1(22.544,30.548) ; u2.7 24.89,16.39 26,17.5 32.802,17.5 C3.1 35.198,17.302 36,16.5 Z2.1@36,14.755 ; Z2.1 Z2.1@36,14.755 ; v3(41.523,15.506) 39.043,15.506 C4.1 37.484,15.549 36.863,14.929 36.173,14.929 Z2.1@36,14.755
  Bottom Layer w0.254: C26.1 22.544,27.094 v1(22.544,30.548) ; C21.1 26.35,29.85 27.152,30.652 C22.1 28.531,30.683 v1(28.531,32.526)
+15VB2: C39.1 C40.1 C51.1 C53.1 C56.1 IC4.6 u4.7 Z4.1 | length 38.7
  Top Layer w0.254: IC4.6 22.781,63 22.941,63.16 22.941,63.441 24,64.5 24,65.351 23.851,65.5 v1(22.5,65.5) ; u4.7 25.39,52.39 26.5,53.5 33.302,53.5 C39.1 34.698,53.302 35.5,52.5 35.851,52.5 36,52.351 ; Z4.1 36,52.351 ; v3(41.5,51.5) 39.049,51.5 C40.1 38.649,51.9 38.649,52.851 38.5,53 36.649,53 36,52.351
  Bottom Layer w0.254: C56.1 v1(22.5,65.5) ; C51.1 26.35,64.85 27,65.5 28.326,65.5 C53.1 28.514,65.34 v1(28.514,67.514)
"-3 VA1": C15.2 C16.2 C24.2 C27.2 C28.2 IC1.4 u1.5 Z1.2 | length 51.3
  Top Layer w0.254: u1.5@19.996,128.814 u1.5 19.81,127.69 20.5,127 C15.2 34.98,127 35.5,127.52 Z1.2 38.324,127.775 C16.2 ; IC1.4 22.77,117.73 23.395,117.105 23.395,116.895 v1(22.5,116)
  Bottom Layer w0.254: u1.5 21,127.81 21,127.5 23.7,124.8 23.7,117.5 22.85,116.65 ; v1(22.5,116) 22.5,116.206 22.85,116.556 22.85,116.65 ; C24.2 22.5,117 22.85,116.65 ; C27.2 v4(28.5,113.5) 28.369,113.631 27.369,113.631 26.5,114.5 26.5,116.351 26.351,116.5 25.15,116.5 C28.2 22.85,116.65
"-3 VA2": C41.2 C42.2 C50.2 C52.2 C54.2 IC3.4 u3.5 Z3.2 | length 62.2
  Top Layer w0.254: u3.5 19.81,95.69 20,95.5 32.396,95.5 C41.2 32.604,95.5 34.851,95.5 35.5,96.149 Z3.2 38.176,97.275 C42.2 38.573,97.024 v1(40.524,97.024) ; IC3.4 22.288,85.96 22.448,85.8 22.448,83.052 v1(23.5,82)
  Bottom Layer w0.254: u3.5 20,97 23.5,93.5 v1(23.5,82) ; C50.2 22.5,82.149 22.649,82 v1(23.5,82) ; C54.2 28.15,83.65 28.5,84 28.515,83.985 v4(28.515,81.485) 28.5,81.5 24,81.5 v1(23.5,82)
"-3 VB1": C17.2 C18.2 C26.2 C29.2 C30.2 IC2.4 u2.5 Z2.2 | length 35.3
  Top Layer w0.254: u2.5 19.81,9.69 20,9.5 32.802,9.5 C17.2 34.903,9.698 36,10.795 Z2.2 36.099,10.951 C18.2 ; IC2.4 22.216,24.664 23.336,24.664 24,24 24,23.706 23.5,23.206 v1(23.5,23)
  Bottom Layer w0.254: C26.2 22.5,24.5 22.5,24 v1(23.5,23) 24.978,21.522 v1(28.49,21.522) 28.49,23.49 C29.2
"-3 VB2": C45.2 C46.2 C56.2 C57.2 C58.2 IC4.4 u4.5 Z4.2 | length 39.5
  Top Layer w0.254: u4.5 20.31,45.69 20.5,45.5 32.802,45.5 32.998,45.696 33.096,45.696 33.5,46.1 C45.2 35.198,46.198 36,47 ; IC4.4 22.969,60.46 23.13,60.298 23.169,60.298 24.008,59.459 24.008,59.248 23.76,59 v1(23,59) ; Z4.2 36,47 ; v1(41.5,47) 39.049,47 C46.2 38.951,47 36,47
  Bottom Layer w0.254: C56.2@22.823,60.702 22.575,60.95 C56.2 22.5,59.5 22.85,59.15 C58.2 25,57.5 26,56.5 v1(28.5,56.5) C57.2
AH_INPUT: R21.1
AL_INPUT: R39.1
BH_INPUT: R22.1
BL_INPUT: R41.1
GND: 
GND_SIGNAL: C5.2 C6.2 C10.2 C11.2 C37.2 C38.2 C43.2 C44.2 u1.2 u2.2 u3.2 u4.2 | length 23.1
  Top Layer w0.254: C10.2 5.514,10.136 v1(5.514,8.962) ; C43.2 5.514,46.786 v1(5.514,45.462) ; v1(5.5,95) C37.2 ; C5.2 C5.2@5.514,128.136 ; C11.2 7.514,10.211 v1(7.514,8.962) ; C44.2 7.514,47.211 v1(7.514,45.962) ; v1(7.5,95.5) 7.5,96.5 C38.2 ; v1(7.5,127) C6.2 ; v2(11.987,127.513) v2@12.089,127.614 ; v2(11.987,130.513) v2@12.089,130.411 ; v2(12,9.5) 12.095,9.595 12.095,10.905 u2.2 12.095,11.095 12.095,12.405 v2(12,12.5) ; v1(12,95.5) 12.095,95.595 12.095,96.905 u3.2 12.095,97.095 v2@12.095,98.5 ; u1.2@12.089,128.899 u1.2 u1.2@12.089,129.101 ; v2(12.5,45.5) 12.595,45.595 12.595,46.905 u4.2 12.595,47.095 12.595,48.405 v2(12.5,48.5)
  Top Layer w0.508: v2@12.089,127.614 u1.2@12.089,128.899 ; u1.2@12.089,129.101 v2@12.089,130.411
  Top Layer w0.762: v1(5.514,126.514) C5.2@5.514,128.136
  other v2: 12,98.5
"MICRO GND": R23.1 R24.1 R40.1 R42.1 | length 10.2
  Top Layer w0.254: v1(4.5,87) R40.1 5.85,86.9 6.32,86.43 6.32,86.18 6.5,86 6.466,85.966 v1(6.466,85.942) ; v1(5.014,24.962) 6.312,24.962 R24.1 6.432,24.918 6.432,23.544 v1(6.514,23.462) ; v1(5.014,60.962) 6.312,60.962 R42.1 6.432,60.918 6.432,60.044 v1(6.514,59.962) ; v1(5.5,118.5) R23.1 6.507,118.493 6.507,117.469 v1(6.514,117.462)
NetC5_1: C5.1 C6.1 R1.2 R5.2 u1.1 | length 4.6
  Top Layer w0.254: C6.1 7.5,130.851 7.649,131 8.5,131 9.65,129.85 u1.1
NetC7_1: 
NetC10_1: C10.1 C11.1 R2.2 R8.2 u2.1 | length 18.7
  Top Layer w0.254: R2.2 1.5,13 2.5,14 3.5,14 ; R8.2 3.5,14 ; C10.1 5.5,14 ; C11.1 7.5,14 ; u2.1 9.65,12.85 8.5,14 7.5,14 ; 3.5,14 5.5,14 ; 5.5,14 7.5,14
NetC23_1: C23.1 IC1.3 R23.2 | length 5.2
  Top Layer w0.254: R23.2 8.5,118.5 8.844,118.844 C23.1 9.625,118.719 10.281,118.719 10.5,118.5 10.5,117.649 10.71,117.649 10.725,117.664 11.784,117.664 IC1.3
NetC23_2: C23.2 IC1.1 R21.2 | length 4.4
  Top Layer w0.254: R21.2 7.8,120.9 8.2,120.5 C23.2 10.951,120.5 11.181,120.27 IC1.1
NetC25_1: C25.1 IC2.3 R24.2 | length 4.5
  Top Layer w0.254: R24.2 7.82,25.17 9.498,25.17 C25.1 10.328,25.172 10.704,24.796 11.784,24.796 IC2.3
NetC25_2: C25.2 IC2.1 R22.2 | length 4.6
  Top Layer w0.254: R22.2@7.5,27 R22.2 7.822,26.828 C25.2 10.754,26.828 11.196,27.27 IC2.1
NetC31_1: C31.1 C32.1 FB1.2 FB3.2 J3.1 J5.1 | length 19.3
  Top Layer w0.254: J3.1 47.15,114.65 FB1.2 48.152,119.5 48.826,120.174 ; FB3.2 48,121 48.826,120.174 ; J5.1 53,116 52,117 C32.1 C31.1 48.826,120.174
NetC33_1: C33.1 C34.1 FB2.2 FB4.2 J4.1 J6.1 | length 28.6
  Top Layer w0.254: J4.1 47.15,23.65 FB2.2 47.15,28.1 47.65,28.6 47.65,29 ; FB4.2 47.15,29.4 47.323,29.227 47.423,29.227 47.65,29 ; C33.1 49.5,28.5 49,29 48.5,29 ; C34.1 49.5,30 49.3,29.4 ; v3(52.5,15.5) J6.1 52.5,28 51.1,29.4 49.3,29.4 ; 47.65,29 48.5,29 ; 48.5,29 49.3,29.4
NetC37_1: C37.1 C38.1 R35.2 R37.2 u3.1 | length 17.3
  Top Layer w0.254: R35.2 1.5,99.5 2,100 3.5,100 ; R37.2 3.5,100 ; C37.1 5.5,100 ; C38.1 7.5,100 ; u3.1 9.65,98.85 8.5,100 7.5,100 ; 3.5,100 5.5,100 ; 5.5,100 7.5,100
NetC43_1: C43.1 C44.1 R36.2 R38.2 u4.1 | length 18
  Top Layer w0.254: R36.2 1.5,50 2,50.5 3.5,50.5 ; R38.2 3.5,50.5 ; C43.1 5.5,50.5 ; C44.1 7.5,50.5 ; u4.1 10.15,48.85 8.5,50.5 7.5,50.5 ; 3.5,50.5 5.5,50.5 ; 5.5,50.5 7.5,50.5
NetC49_1: C49.1 IC3.3 R40.2 | length 4.9
  Top Layer w0.254: 7.083,86.583 7.165,86.5 C49.1 10.585,86.5 11.125,85.96 IC3.3
NetC49_2: C49.2 IC3.1 R39.2 | length 5
  Top Layer w0.254: 7.15,88 7.306,88.156 8.844,88.156 9,88 C49.2 10.687,88.156 11.031,88.5 IC3.1
NetC55_1: C55.1 IC4.3 R42.2 | length 4.1
  Top Layer w0.254: R42.2 9,61 ; C55.1 10.885,61 11.425,60.46 IC4.3
NetC55_2: C55.2 IC4.1 R41.2 | length 5
  Top Layer w0.254: R41.2 8.5,63 8.842,62.658 10.058,62.658 10.4,63 IC4.1
NetC59_1: C59.1 C60.1 FB5.2 FB6.2 J14.1 J17.1 | length 26.7
  Top Layer w0.254: FB5.2 FB5.2@47,89.1 ; J17.1 FB5.2@47,89.1 ; C60.1 49.848,90 47.9,90 ; v7(53,83) 55,83 J14.1 55.5,86 55,86.5 52.5,86.5 C59.1 48,86.5 47.273,87.227 47.173,87.227 47,87.4 FB6.2 47,87.6 47.9,88.5 47.9,90 ; FB5.2@47,89.1 47.9,90
NetC61_1: C61.1 C62.1 FB7.2 FB8.2 J16.1 J19.1 | length 25.7
  Top Layer w0.254: J19.1 47.65,70.35 FB7.2 49.826,65.5 C61.1 51.826,65.674 52.5,65 52.5,64 51.326,62.826 ; FB8.2 47.65,63.9 48.724,62.826 C62.1 51.326,62.826 ; v9(54.5,57) J16.1 52,62.152 51.326,62.826
NetD1_1: D1.1 R25.2 | length 2.2
  Top Layer w0.254: R25.2 D1.1
NetD1_2: D1.2 R26.1 R31.2 | length 9.7
  Top Layer w0.254: R31.2 39.5,116 40.45,116.95 D1.2 R26.1
NetD2_1: D2.1 R27.2 | length 2.1
  Top Layer w0.254: R27.2 D2.1
NetD2_2: D2.2 R28.1 R32.2 | length 9.5
  Top Layer w0.254: R32.2 40,24.5 40.4,24.9 D2.2 41.45,27.5 41.85,27.9 R28.1
NetD3_1: D3.1 R43.2 | length 2.2
  Top Layer w0.254: R43.2 D3.1
NetD3_2: D3.2 R44.1 R48.2 | length 10
  Top Layer w0.254: R48.2 39,83.5 40,83.5 40.5,84 40.5,86.45 D3.2 41.95,86.5 42.35,86.9 R44.1
NetD4_1: D4.1 R46.2 | length 2.6
  Top Layer w0.254: R46.2 D4.1
NetD4_2: D4.2 R47.1 R50.2 | length 10.1
  Top Layer w0.254: R50.2 40.5,60 40.95,60.45 D4.2 42.1,63 42.5,63.4 R47.1
NetDNP1_2: 
NetDNP2_2: 
NetFB1_1: FB1.1 FB3.1 R26.2 R29.2 | length 5.3
  Top Layer w0.254: R26.2 44.675,119.5 ; R29.2 44.5,119.325 44.675,119.5 ; FB3.1 FB1.1 44.675,119.5
NetFB2_1: FB2.1 FB4.1 R28.2 R30.2 | length 5.1
  Top Layer w0.254: R28.2 44.5,28 ; R30.2 44.5,28 ; FB4.1 FB2.1 44.5,28
NetFB5_1: FB5.1 FB6.1 R44.2 R45.2 | length 5.1
  Top Layer w0.254: R44.2 44.5,87 ; R45.2 44.5,87 ; FB5.1 FB6.1 45,87.5 44.5,87
NetFB7_1: FB7.1 FB8.1 R47.2 R49.2 | length 5.1
  Top Layer w0.254: R47.2 44.851,63.5 45,63.351 ; R49.2 45,63.351 ; FB7.1 FB8.1 45.649,64 45,63.351
NetIC1_5: IC1.5 R25.1 R31.1 | length 14.7
  Top Layer w0.254: IC1.5 23.351,119 23.5,119.149 23.5,119.351 23.574,119.426 23.649,119.5 28.351,120.121 cw(c28.5,119) 28.505,120.131 32.171,120.131 R25.1 R31.1
NetIC2_5: IC2.5 R27.1 R32.1 | length 19.6
  Top Layer w0.254: IC2.5 26,26 26.5,26.5 ; R32.1 32.603,24.741 32.171,25.173 31.93,25.173 31.603,25.5 27,25.5 26.5,26 26.5,26.5 ; R27.1 30,27.5 29,28.5 28,28.5 27.5,28 27.5,27.5 26.5,26.5
NetIC3_5: IC3.5 R43.1 R48.1 | length 15.8
  Top Layer w0.254: IC3.5 27.27,87.23 28,86.5 30.301,86.5 ; R48.1 32.603,83.568 32.171,84 30.5,84 30.301,84.199 30.301,86.5 ; R43.1 30.301,86.5
NetIC4_5: IC4.5 R46.1 R50.1 | length 17.6
  Top Layer w0.254: IC4.5 26.73,61.73 ; R50.1 32.603,60.068 32.171,60.5 27.96,60.5 26.73,61.73 ; R46.1 28,63 26.73,61.73
NetR3_1: 
NetR6_1: 
NetR6_2: 
NetR9_1: 
NetR13_1: 
NetR15_2: 
NetR16_2: 
SOURCE_AL: C35.2 C36.2 C41.1 C42.1 C47.2 C48.2 C52.1 C54.1 C59.2 C60.2 J22.1 R45.1 u3.6 | length 24.2
  Top Layer w0.254: C41.1 32.487,97.013 v1(32.487,98.987) 32.487,100.685 C35.2 ; v1(38.493,107.007) 38.493,104.958 C36.2 ; v1(38.5,92.5) C42.1 ; v1(44.464,83.124) 44.464,84.314 R45.1 ; v10(46,102) J22.1 ; v1(49.998,83.498) 49.998,84.847 C59.2 ; C60.2 v1(50,93)
  Bottom Layer w0.254: C47.2 C54.1 25.024,85.326 C52.1 28.517,85.342 v5(28.517,87.483) 28.517,89.158 C48.2
SOURCE_AU: C1.2 C2.2 C15.1 C16.1 C19.2 C20.2 C27.1 C28.1 C31.2 C32.2 J10.1 R29.1 R30.1 u1.6 | length 18.8
  Top Layer w0.254: C15.1 33.028,128.632 v1(33.028,130.004) 33.028,131.67 C1.2 ; C2.2@38.495,135.406 C2.2 ; v1(44.5,115.5) R29.1 ; v11(49.956,113.651) 49.956,115.305 C32.2 ; C31.2 v1(50,123)
  Top Layer w0.508: C2.2@38.495,135.406 38.5,135.411 v1(38.5,137)
  Bottom Layer w0.254: C28.1 C19.2@25,121.1 ; C19.2 C19.2@25,121.1 ; C27.1 v4(28.5,119) C20.2 25.426,120.674 C19.2@25,121.1
SOURCE_BL: C39.2 C40.2 C45.1 C46.1 C51.2 C53.2 C57.1 C58.1 C61.2 C62.2 J24.1 R49.1 u4.6 | length 20.4
  Top Layer w0.254: C45.1 33.499,47.803 v1(33.499,50.001) 33.499,51.697 C39.2 ; v1(39,42) C46.1 ; C40.2 v1(39,56.5) ; v1(45,60.5) R49.1 ; v1(50,59.5) C62.2
  Bottom Layer w0.254: C58.1 C51.2 26.65,63.15 27.174,63.674 C53.2 28.514,63.66 v1(28.514,61.514) 28.514,59.84 C57.1
SOURCE_BU: C3.2 C4.2 C17.1 C18.1 C21.2 C22.2 C29.1 C30.1 C33.2 C34.2 J12.1 u2.6 | length 22.8
  Top Layer w0.254: C17.1 v1(33,13.5) C3.2 ; v8(39,6) C18.1 ; C4.2 v3(39,20.5) ; J12.1 v6(48,14.5) ; C34.2 v1(49.5,34.5)
  Bottom Layer w0.254: C30.1 C21.2 26.15,28.15 27,29 C22.2 28.508,28.992 v3(28.508,27.028) 28.508,25.16 C29.1
pads on no net: IC1.2 IC2.2 IC3.2 IC4.2
copper on no net: | length 13.4
  Top Layer w0.254: 14.926,68.777 15.425,67.25 ; 14.983,78.229 15.5,79.75 ; 15.171,67.252 15.679,67.248 ; 15.246,79.752 15.754,79.748 ; 15.443,70.238 15.425,67.25 ; 15.482,76.762 15.5,79.75 ; 15.942,68.771 15.425,67.25 ; 15.999,78.223 15.5,79.75

## Polygon pours and split planes (outlines as drawn)
GND_SIGNAL on Layer 1 "GND_SIGNAL_L02_P001" (solid, pour order 1): 1,138 1,2.5 14,2.5 14.5,3 14.5,138
SOURCE_BL on Layer 1 "NONET_L-01_P-001" (solid, pour order 7): 20,67 20,45.5 23.5,42 44,42 44,57 46.5,59.5 54,59.5 54,67.5 51.5,70 51,69.5 23.5,69.5
SOURCE_BU on Layer 1 "NONET_L-01_P-001" (solid, pour order 8): 20,29 20,11.19 19.81,11 23.81,7 52.5,7 52.5,33.5 51,35 24,35
SOURCE_AL on Layer 1 "NONET_L-01_P-001" (solid, pour order 6): 20,82.5 22.5,80 53,80 54.5,81.5 54.5,92.5 45.5,92.5 45.5,107.5 22.5,107.5 20,105
SOURCE_AU on Layer 1 "NONET_L-01_P-001" (solid, pour order 5): 19,114 21.5,111.5 52,111.5 53.5,113 53.5,123 44.5,123 44,123.5 44.5,124 44.5,139 21.5,139 19,136.5
"+15 VIN" on Layer 2 "NONET_L-01_P-001" (solid, pour order 9): 1,133 14,133 14,6 13.491,5.491 1.568,5.491
+15VB2 on Layer 2 "NONET_L-01_P-001" (solid, pour order 12): 31.5,54 31.5,44 33,42.5 41,42.5 41,55.5 40,56.5 33,56.5
+15VA1 on Layer 2 "NONET_L-01_P-001" (solid, pour order 10): 31.5,135 31.5,125 33,123.5 41,123.5 41,136.5 40,137.5 33,137.5
+15VB1 on Layer 2 "NONET_L-01_P-001" (solid, pour order 13): 31,18.5 31,8.5 32.5,7 40.5,7 40.5,20 39.5,21 32.5,21
+15VA2 on Layer 2 "NONET_L-01_P-001" (solid, pour order 11): 31,104.5 31,94.5 32.5,93 40.5,93 40.5,106 39.5,107 32.5,107
"MICRO GND" on Bottom Layer "NONET_L-01_P-001" (solid, pour order 21): 1,9 11.5,9 13,10.5 13,12 12.5,12.5 12.5,28.5 6.5,28.5 5.5,27.5 5.5,14 4.5,13 1,13 0.5,12.5 0.5,9.5
"MICRO GND" on Bottom Layer "NONET_L-01_P-001" (solid, pour order 20): 2,100 1,99 0.5,99 0.5,95.5 1,95 5.5,95 5.5,86 6,85.5 12.5,85.5 12.5,96.5 13,97 13,98.5 12.5,98.5 11,100
"MICRO GND" on Bottom Layer "NONET_L-01_P-001" (solid, pour order 19): 2,132 1,131 0.5,131 0.5,127.5 1,127 5.5,127 5.5,118 6,117.5 12.5,117.5 12.5,128.5 13,129 13,130.5 12.5,130.5 11,132
"MICRO GND" on Bottom Layer "NONET_L-01_P-001" (solid, pour order 22): 1,46 11.5,46 13,47.5 13,49 12.5,49.5 12.5,65.5 6.5,65.5 5.5,64.5 5.5,51 4.5,50 1,50 0.5,49.5 0.5,46.5
"-3 VB1" on Bottom Layer "NONET_L-01_P-001" (solid, pour order 18): 31.5,17.5 32.5,18.5 39.5,18.5 40.5,17.5 40.5,9 40,8.5 38,8.5 37.5,9 20,9 19.5,9.5 19.5,16 21,17.5
"-3 VB2" on Bottom Layer "NONET_L-01_P-001" (solid, pour order 17): 31.5,53.5 32.5,54.5 39.5,54.5 40.5,53.5 40.5,45 40,44.5 38,44.5 37.5,45 20,45 19.5,45.5 19.5,52 21,53.5
"-3 VA2" on Bottom Layer "NONET_L-01_P-001" (solid, pour order 15): 40,103.5 40,95 39.5,94.5 19.5,94.5 19.5,98.5 20,99 31.5,99 31.5,103.5 32,104 39.5,104
"-3 VA1" on Bottom Layer "NONET_L-01_P-001" (solid, pour order 14): 40,134.5 40,126 39.5,125.5 19.5,125.5 19.5,129.5 20,130 31.5,130 31.5,134.5 32,135 39.5,135
"+15 VIN" on Top Layer "NONET_L-01_P-001" (solid, pour order 32): 0.396,128.541 4.396,128.541 4.396,126.541 3.896,126.041 0.896,126.041 0.396,126.541
"+15 VIN" on Top Layer "NONET_L-01_P-001" (solid, pour order 31): 0.5,97 4.5,97 4.5,95 4,94.5 1,94.5 0.5,95
"+15 VIN" on Top Layer "NONET_L-01_P-001" (solid, pour order 29): 0.5,47 4.5,47 4.5,45 4,44.5 1,44.5 0.5,45
"+15 VIN" on Top Layer "NONET_L-01_P-001" (solid, remove dead copper, pour order 28): 4.074,11.018 4.1,10.993 4.1,9.326 3.304,8.531 1.264,8.531 0.633,9.162 0.633,10.838 0.684,10.89
NetC10_1 on Top Layer "NONET_L-01_P-001" (solid, remove dead copper, pour order 27): 2.927,11.289 2.928,11.29 8.104,11.29 8.414,10.98 9.836,10.98 10.093,11.238 10.093,13.93 9.607,14.416 3.361,14.416 3.349,14.428 1.303,14.428 0.526,13.651 0.537,13.64 0.537,11.474 0.722,11.289
NetC43_1 on Top Layer "NONET_L-01_P-001" (solid, remove dead copper, pour order 26): 2.927,47.789 2.928,47.79 8.104,47.79 8.414,47.48 9.836,47.48 10.093,47.738 10.093,50.43 9.607,50.916 3.361,50.916 3.349,50.928 1.303,50.928 0.526,50.151 0.537,50.14 0.537,47.974 0.722,47.789
NetC37_1 on Top Layer "NONET_L-01_P-001" (solid, remove dead copper, pour order 25): 2.927,97.789 2.928,97.79 8.104,97.79 8.414,97.48 9.836,97.48 10.093,97.738 10.093,100.43 9.607,100.916 3.361,100.916 3.349,100.928 1.303,100.928 0.526,100.151 0.537,100.14 0.537,97.974 0.722,97.789
NetC5_1 on Top Layer "NONET_L-01_P-001" (solid, remove dead copper, pour order 23): 2.631,129.193 2.632,129.194 7.808,129.194 8.118,128.884 9.54,128.884 9.797,129.142 9.797,131.834 9.311,132.32 3.065,132.32 3.053,132.332 1.007,132.332 0.23,131.555 0.241,131.544 0.241,129.378 0.426,129.193

## Other copper
Top Layer:
  text "12.5 (mm)" at 16.084,70.488 h1.52 r89.66
Multi-Layer:
  lines w0.254: 14.902,41.269 15.425,39.75 ; 15.007,30.721 15.5,32.25 ; 15.171,39.747 15.679,39.753 ; 15.246,32.247 15.754,32.253 ; 15.299,106.381 15.632,107.381 ; 15.299,113.381 15.632,112.381 ; 15.378,107.381 15.886,107.381 ; 15.378,112.381 15.886,112.381 ; 15.4,42.29 15.425,39.75 ; 15.525,29.71 15.5,32.25 ; 15.632,104.841 15.632,107.381 ; 15.632,114.921 15.632,112.381 ; 15.918,41.279 15.425,39.75 ; 15.966,106.381 15.632,107.381 ; 15.966,113.381 15.632,112.381 ; 16.023,30.731 15.5,32.25 ; 17.567,33.774 18.075,32.25 ; 17.567,110.726 18.075,112.25 ; 17.821,32.25 18.329,32.25 ; 17.821,112.25 18.329,112.25 ; 18.075,69.51 18.075,32.25 ; 18.075,74.99 18.075,112.25 ; 18.583,33.774 18.075,32.25 ; 18.583,110.726 18.075,112.25
  text "5 (mm)" at 17.311,108.5 h1 r90
  text "80 (mm)" at 18.715,69.764 h1.52 r90
  text "7.5 (mm)" at 11.751,41.448 h1.52 r270.57

## Text inside footprints (layer, text, board x,y; h text height)
Z1: Mechanical 13 "*" at 34.865,130.989 h1.27 r270
Z2: Mechanical 13 "*" at 35.365,14.264 h1.27 r270
Z3: Mechanical 13 "*" at 34.865,100.488 h1.27 r270
Z4: Mechanical 13 "*" at 35.365,51.213 h1.27 r270